# Altium PCB Samroz_PCB.PcbDoc
Units mil, origin at the board's own origin, x right, y up, seen from the top; angles counter-clockwise.
Board outline 3590 x 3360 mil, 2 copper layers (Top Layer, Bottom Layer); 38 components, 28 nets, 99 pads, 11 vias.
Unrouted connection lines stored in the file: 1.
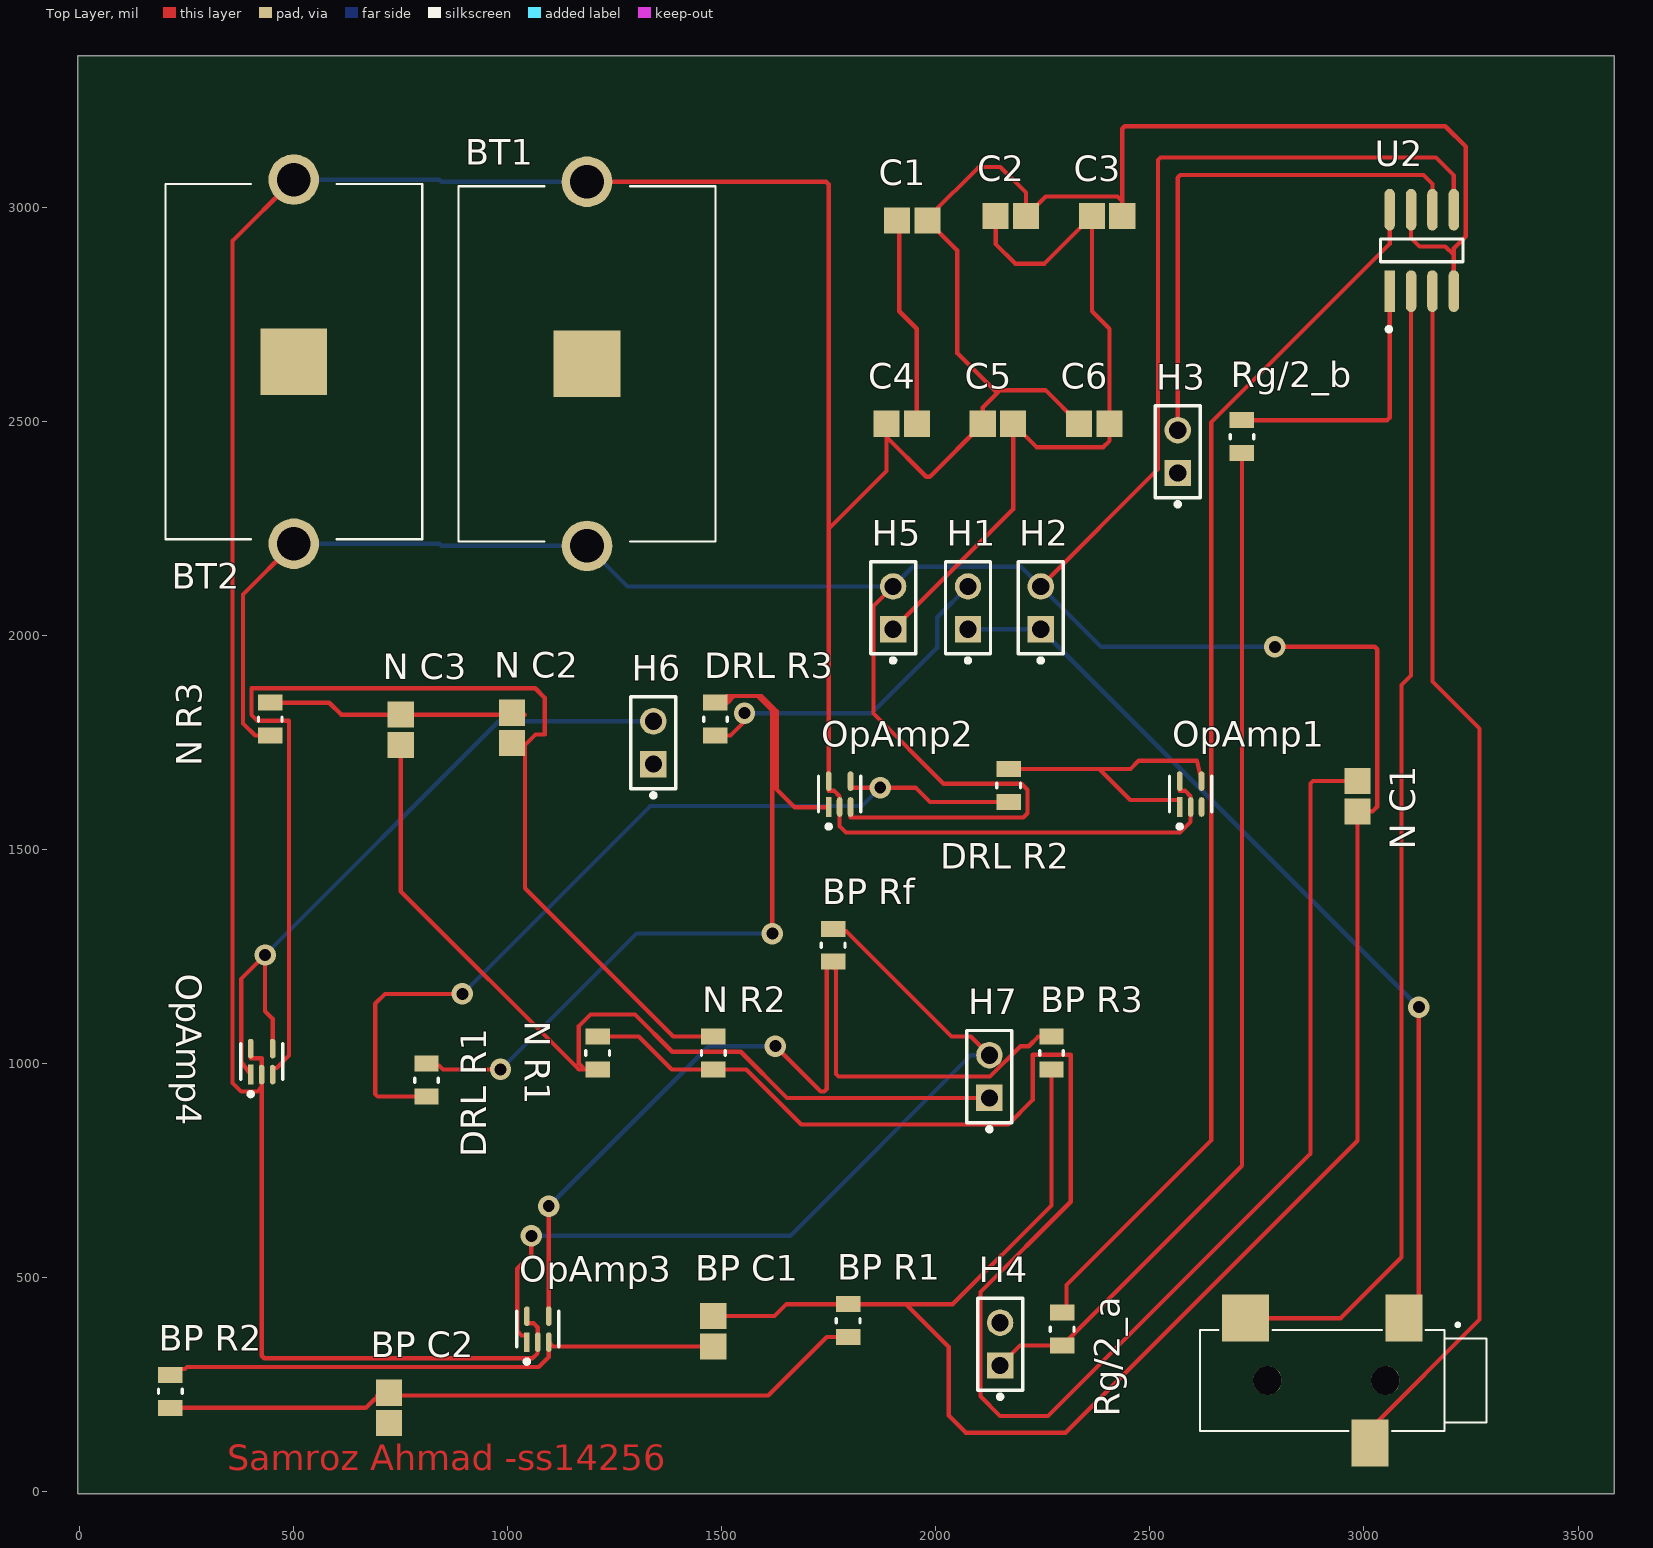
[diagram p0: Top Layer view]
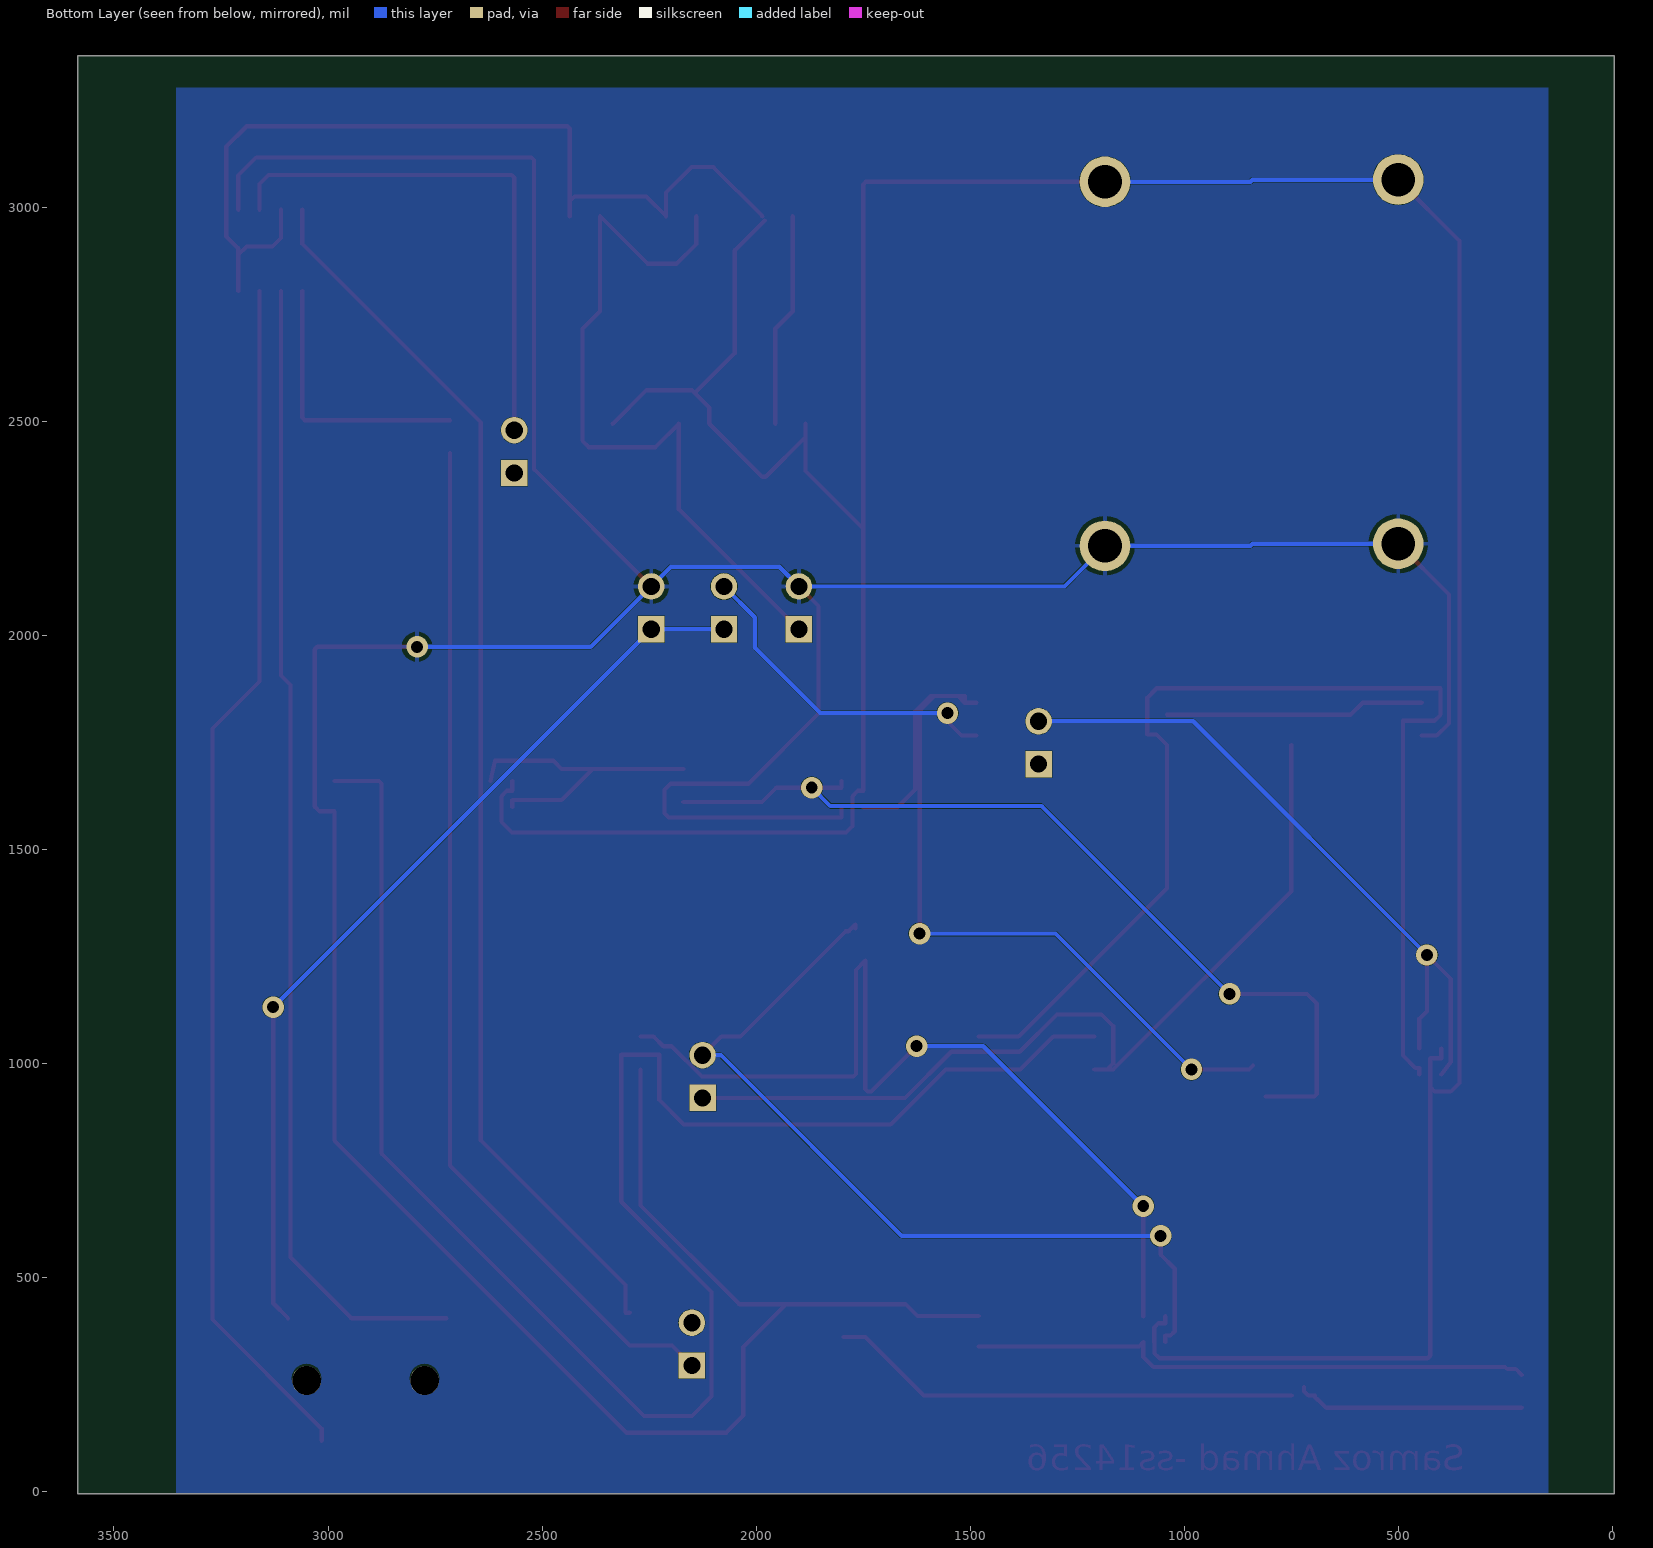
[diagram p1: Bottom Layer view, seen from below]
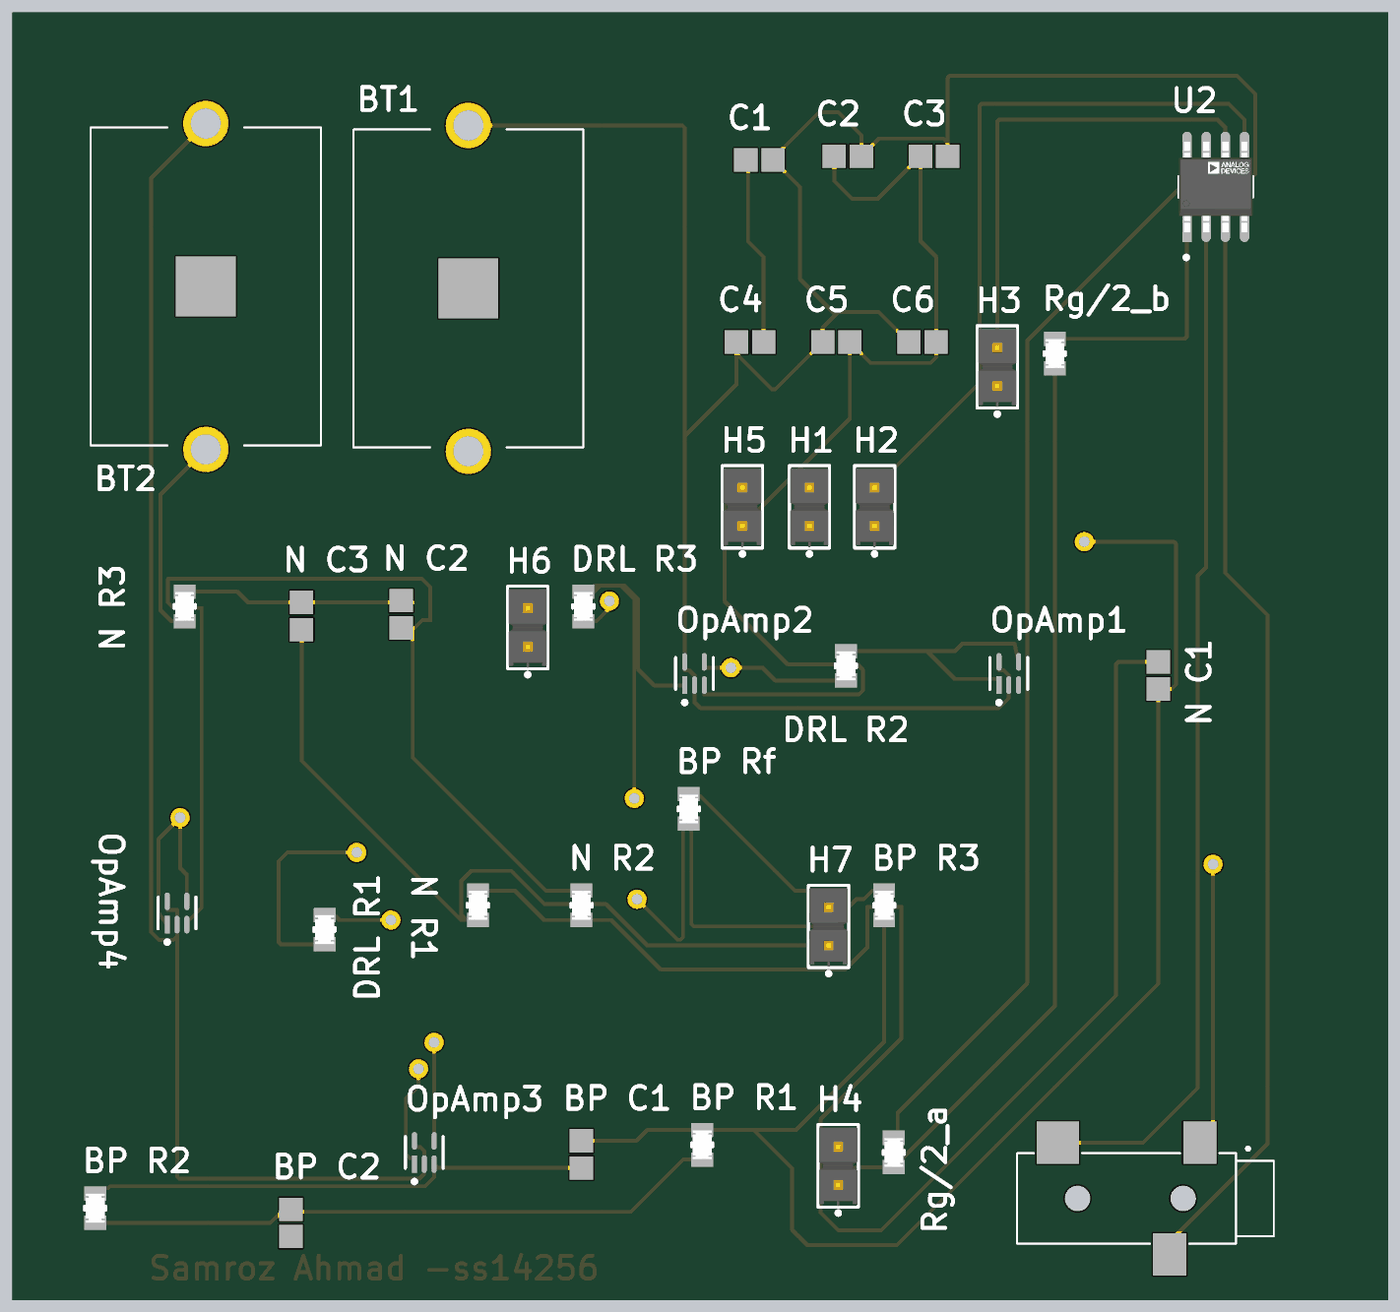
[diagram p2: 3D render of the assembled board from above, using the file's embedded part models]

## Layer stack, top to bottom
Top Solder: solder mask 0.4, Solder Resist, Dk 3.5
Top Layer: signal copper 1.4
Dielectric 1: dielectric 12.6, FR-4, Dk 4.8
Bottom Layer: signal copper 1.4
Bottom Solder: solder mask 0.4, Solder Resist, Dk 3.5

## Board outline
-5,-5 3585,-5 3585,3355 -5,3355

## Design rules (kind name [scope] priority, off if disabled: settings)
Clearance [All] p1: gap=0.5 ignorepadtopadclearanceinfootprint=FALSE
MinimumSolderMaskSliver [All] p1: minsoldermaskwidth=0.5
PolygonConnect [All] p1: connectstyle=Relief reliefconductorwidth=10 reliefentries=4 polygonreliefangle="90 Angle" airgapwidth=10
RoutingVias [All] p1: holewidth=28 width=50 viastyle="Through Hole" minholewidth=28 minwidth=50 maxholewidth=28 maxwidth=50
SilkToSolderMaskClearance [IsPad] p1: minsilkscreentomaskgap=5 clearancetoexposedcopper=TRUE
SolderMaskExpansion [All] p1: expansion=4 istentingtop=FALSE
Width [All] p1: maxlimit=10 minlimit=10 preferedwidth=10
28 further rules are at their usual default settings.

## Components (designator, comment, footprint, x,y, rotation, side; value= is the part's Value field where it differs from the comment)
"BP C1" "08052U220GAT2A" CAPC2013X115X51ML20T26 1480,375 r90 top
"BP C2" "08052U220GAT2A" CAPC2013X115X51ML20T26 722.07,195.95 r90 top
"BP R1" "CRCW08053K30FKEA" FP-CRCW0805-e3-MFG#1 1795,400 r90 top
"BP R2" "CRCW08053K30FKEA" FP-CRCW0805-e3-MFG#2 211.5,234.69 r90 top
"BP R3" "CRCW08053K30FKEA" FP-CRCW0805-e3-MFG#1 2270,1025 r90 top
"BP Rf" "CRCW08053K30FKEA" FP-CRCW0805-e3-MFG#1 1760,1276.61 r90 top
BT1 "BK-913-TR" BAT_BK-913-TR 1185,2635 r270 top
BT2 "BK-913-TR" BAT_BK-913-TR 500,2640 r90 top
C1 "08052U220GAT2A" CAPC2013X115X51ML20T26 1944.57,2970 r0 top
C2 "08052U220GAT2A" CAPC2013X115X51ML20T26 2175,2980 r0 top
C3 "08052U220GAT2A" CAPC2013X115X51ML20T26 2400,2980 r0 top
C4 "08052U220GAT2A" CAPC2013X115X51ML20T26 1920,2495 r0 top
C5 "08052U220GAT2A" CAPC2013X115X51ML20T26 2145,2495 r0 top
C6 "08052U220GAT2A" CAPC2013X115X51ML20T26 2370,2495 r0 top
"DRL R1" "CRCW08053K30FKEA" FP-CRCW0805-e3-MFG#1 810,961.61 r270 top
"DRL R2" "CRCW08053K30FKEA" FP-CRCW0805-e3-MFG#1 2170,1650 r90 top
"DRL R3" "CRCW08053K30FKEA" FP-CRCW0805-e3-MFG#1 1485,1805 r90 top
H1 "TSW-102-07-L-S" FP-TSW-102-07-L-S-MFG 2075,2065 r90 top
H2 "TSW-102-07-L-S" FP-TSW-102-07-L-S-MFG 2245,2065 r90 top
H3 "TSW-102-07-L-S" FP-TSW-102-07-L-S-MFG 2565,2430 r90 top
H4 "TSW-102-07-L-S" FP-TSW-102-07-L-S-MFG 2150,345 r90 top
H5 "TSW-102-07-L-S" FP-TSW-102-07-L-S-MFG 1900,2065 r90 top
H6 "TSW-102-07-L-S" FP-TSW-102-07-L-S-MFG 1340,1750 r90 top
H7 "TSW-102-07-L-S" FP-TSW-102-07-L-S-MFG 2125,970 r90 top
Jack1 "SJ-3523-SMT-TR" CUI_SJ-3523-SMT-TR 3050,260 r180 top
"N C1" "08052U220GAT2A" CAPC2013X115X51ML20T26 2985,1625 r90 top (schematic designator "Notch C1")
"N C2" "08052U220GAT2A" CAPC2013X115X51ML20T26 1010,1784.57 r90 top
"N C3" "08052U220GAT2A" CAPC2013X115X51ML20T26 750,1780 r90 top
"N R1" "CRCW08053K30FKEA" FP-CRCW0805-e3-MFG#1 1210,1025 r90 top
"N R2" "CRCW08053K30FKEA" FP-CRCW0805-e3-MFG#1 1480,1025 r90 top
"N R3" "CRCW08053K30FKEA" FP-CRCW0805-e3-MFG#1 445,1805 r90 top
OpAmp1 "TLV521DCKT" FP-DCK0005A-IPC_C 2595,1630 r90 top
OpAmp2 "TLV521DCKT" FP-DCK0005A-IPC_C 1775,1630 r90 top
OpAmp3 "TLV521DCKT" FP-DCK0005A-IPC_C 1070,380 r90 top
OpAmp4 "TLV521DCKT" FP-DCK0005A-IPC_C 425,1005 r90 top
Rg/2_a "CRCW08053K30FKEA" FP-CRCW0805-e3-MFG#1 2295,380 r90 top (schematic designator Rg/2_s)
Rg/2_b "CRCW08053K30FKEA" FP-CRCW0805-e3-MFG#1 2715,2465 r90 top (schematic designator Rg/2_f)
U2 "AD620ARZ-REEL7" FP-R-8-IPC_A 3135,2900 r90 top

## Footprints (in the part's own frame and the unit in brackets; to place one, negate y for a bottom-side part, rotate by r counter-clockwise, add the part's x,y. Pads: shape width x height; smd on the part's side, far side on the other; paste and mask are expansions set on the pad)
BAT_BK-913-TR [mm]
  round 3 hole 2: 1(-10.8,0) 2(10.8,0)
  rect 3.96x3.96 smd: 3(0,0)
  silkscreen extent -10.54,-7.62 10.54,7.62
CAPC2013X115X51ML20T26 [mm] "Chip Capacitor, 2-Leads, Body 2.01x1.25mm, IPC Low Density"
  rect 1.55x1.55 smd: 1(-0.9,0) 2(0.9,0)
  body extent -1.11,-0.72 1.1,0.72, height 1.15
CUI_SJ-3523-SMT-TR [mm]
  rect 2.2x2.8 smd: 1(-1.1,-3.7) 3(0.9,3.7)
  rect 2.8x2.8 smd: 2(8.3,-3.7)
  round 1.7 hole 1.7 unplated: ""(0,0) ""(7,0)
  silkscreen extent -6,-3.4 11,3
FP-CRCW0805-e3-MFG#1 [mm]
  rect 0.95x1.45 smd paste+0 mask+0: 1(-0.975,0) 2(0.975,0)
  silkscreen extent -0.13,-0.7 0.13,0.7, body extent -1.55,-0.82 1.55,0.82, height 0.25
FP-CRCW0805-e3-MFG#2 [mm]
  rect 0.95x1.45 smd paste+0 mask+0: 2(0.975,0) ""(-0.975,0)
  silkscreen extent -0.13,-0.7 0.13,0.7, body extent -1,-0.62 1,0.63, height 0.5
FP-DCK0005A-IPC_C [mm]
  rect 1.164x0.336 smd paste+0 mask+0: 1(-0.77,0.65)
  rrect100% 1.164x0.336 smd paste+0 mask+0: 2(-0.77,0) 3(-0.77,-0.65) 4(0.77,-0.65) 5(0.77,0.65)
  silkscreen extent -2.05,-1.25 1.05,1.25
FP-R-8-IPC_A [mil]
  rect 97.4x24.49 smd paste+0 mask+0: 1(-95.12,75)
  rrect100% 97.4x24.49 smd paste+0 mask+0: 2(-95.12,25) 3(-95.12,-25) 4(-95.12,-75) 5(95.12,-75) 6(95.12,-25) 7(95.12,25) 8(95.12,75)
  silkscreen extent -189,-96 27,96, body extent -164,-116 164,116, height 10
FP-TSW-102-07-L-S-MFG [mm]
  rect 1.57x1.57 hole 1.02 paste-1000 mask+0: 1(-1.27,0)
  round 1.57 hole 1.02 paste-1000 mask+0: 2(1.27,0)
  silkscreen extent -3.25,-1.34 2.73,1.34, body extent -2.83,-1.44 2.83,1.44, height 0.25

## Part data
"BP C1" "BP C2" C1 C2 C3 C4 C5 C6 "N C1" "N C2" "N C3": library part CMP-2007-04866-1, Manufacturer="AVX Interconnect / Elco", Part Number=08052U220GAT2A
"BP R1" "BP R2" "BP R3" "BP Rf" "DRL R1" "DRL R2" "DRL R3" "N R1" "N R2" "N R3" Rg/2_a Rg/2_b: library part CMP-2001-03876-2, "RES Thick Film, 3.3kΩ, 1%, 0.125W, 100ppm/°C, 0805", Case Code (Imperial)=0805, Case Code (Metric)=2012, Max Operating Temperature=155°C, Max Power Dissipation=125mW, Min Operating Temperature=-55°C, Package Quantity=10, Resistance=3.3kR, Temperature Coefficient=100ppm/°C, Tolerance=1%, Voltage Rating=150V, Case/Package=0805, Composition="Thick Film", Contact Plating=Tin, Depth=1.25mm, Features="Automotive AEC-Q200", Height=0.45mm, Lead Free="Lead Free", Length=2mm, Military Standard=Not, Mount="Surface Mount", Number of Terminations=2, Packaging="Tape and Reel", Power Rating=125mW, Radiation Hardening=No, Termination=SMD/SMT, Voltage Rating (DC)=150V, Weight=0.000194oz, Width=1.25mm
BT1 BT2: "Battery Retainer Coin, 20.0mm 1 Cell PC Pin", Package="MSOP-12 MPD", Digi-Key_Part_Number=BK-913-CT-ND, MF="MPD (Memory", MP=BK-913-TR, SnapEDA_Link=https://www.snapeda.com/parts/BK-913-TR/MPD%20(Memory%20Protection%20Devices)/view-part/576523/?ref=snap
H1 H2 H3 H4 H5 H6 H7: library part CMP-02766-001428-1, "CONN HEADER VERT 2POS 2.54MM", Color=Black, Current Rating=7.6A, Max Operating Temperature=125°C, Max Voltage Rating (AC)=550V, Min Operating Temperature=-55°C, Package Quantity=1, Connector Type="Male Pin", Contact Material=Bronze, Contact Mating Length=0.23inch, Contact Plating=Gold, Contact Type="Male Pin", Depth=2.54mm, Gender=Male, Housing Color=Black, Housing Material=Polyester, Lead Free="Lead Free", Length=5.08mm, Max Current Rating=7.6A, Mount="Through Hole", Number of Contacts=2, Number of Positions=2, Number of Rows=1, Orientation=Straight, Packaging=Bulk, Pitch=2.54mm, Radiation Hardening=No, REACH SVHC="No SVHC", RoHS Compliant=Yes, Series=TSW, Termination=Solder, Voltage Rating=550V, Width=2.54mm
Jack1: "<b>Audio Jack Connector</b> 3.5 mm Low Profile Surface Mount Stereo Jack, 3 Pin Right-Angle", Package=None, Availability=Unavailable, MP=SJ-3523-SMT-TR, Price=None
OpAmp1 OpAmp2 OpAmp3 OpAmp4: library part CMP-04895-000072-1, "IC CMOS 1 CIRCUIT SC70-5", Case/Package=SC, Input Bias Current=1pA, Input Offset Voltage (Vos)=100uV, Max Operating Temperature=125°C, Min Operating Temperature=-40°C, Operating Supply Current=350nA, Output Current per Channel=12mA, Bandwidth=6kHz, Gain Bandwidth Product=6kHz, Lead Free="Lead Free", Mount="Surface Mount", Number of Amplifiers=1, Number of Channels=1, Number of Circuits=1, Number of Pins=5, Packaging="Cut Tape", REACH SVHC="No SVHC", Slew Rate=2.5V/µs
U2: library part CMP-09116-000354-1, "IC INST AMP 1 CIRCUIT 8SOIC", Case/Package=SOIC, Dual Supply Voltage=15V, Input Bias Current=500pA, Input Offset Voltage (Vos)=30mV, Input Resistance=10GR, Max Dual Supply Voltage=18V, Max Operating Temperature=125°C, Max Power Dissipation=650mW, Min Dual Supply Voltage=2.3V, Min Operating Temperature=-55°C, Min Supply Voltage=4.6V, Nominal Supply Current=900uA, Operating Supply Current=1.3mA, Output Current per Channel=18mA, Package Quantity=1, Power Supply Rejection Ratio (PSRR)=140dB, -3db Bandwidth=1MHz, Bandwidth=800kHz, Common Mode Rejection Ratio=93dB, Contact Plating=Tin, Lead Free="Contains Lead", Mount="Surface Mount", Number of Channels=1, Number of Circuits=1, Number of Elements=1, Number of Pins=8, Operating Supply Voltage=18V, Packaging="Tape and Reel", Power Dissipation=650mW, Radiation Hardening=No, RoHS Compliant=Yes, Series=-, Slew Rate=1.2V/µs, Supply Current=900uA

## Via types
v1: diameter 50, hole 28, Top Layer to Bottom Layer, 11 vias

## Nets (pads, with @x,y where several pads share a name; then routed paths per layer and width w, separated by ;. In a path a pad name is that pad's centre, name@x,y a point inside that pad or via, vN(x,y) a via of type N, cw(c..) or ccw(c..) an arc to the next point about the centre after c; other vN are vias at no path point)
"Bandpass input": H3.1
GND: "BP C1.2" "BP R1.2" "BP R3.1" "N C1.1" "N R3.1" BT1.2 BT2.1 H2.2 H5.2 OpAmp2.3 U2.5 | length 10321.3
  Top Layer w10: 445,1766.61 409.84,1766.61 381.46,1795 381.46,2096.26 BT2.1 ; 1480,410.43 1623,410.43 1650.95,438.39 1795,438.39 1929.61,438.39 ; OpAmp2.3 1800.59,1575 2204,1575 2214,1585 2214,1640 2200,1654 2018,1654 1854,1818 1854,2069 H5.2 ; H2.2 2519,2389 2519,3111.14 2524.86,3117 3168,3117 3210,3075 U2.5 ; 2270,986.61 2270,669 2039.39,438.39 1929.61,438.39 ; v1(2792,1974) 3025.14,1974 3031,1968.14 3031,1600.57 3020,1589.57 2985,1589.57 2985,820 2303,138 2070,138 2030,178 2030,338 1929.61,438.39
  Bottom Layer w10: BT2.1 840,2214.8 845,2209.8 BT1.2 1279.8,2115 H5.2 1946,2161 2199,2161 H2.2 2386,1974 v1(2792,1974)
"Input of Bandpass": "BP C2.1"
"Input of DRL": "DRL R3.1" H1.2 | length 787.3
  Top Layer w10: 1485,1766.61 1520,1766.61 1553,1799.61 v1(1553,1819)
  Bottom Layer w10: v1(1553,1819) 1850,1819 2003,1972 2003,2043 H1.2
"Input of Notch": "N C3.1" "N R1.1" H7.1 | length 2132.4
  Top Layer w10: 750,1744.57 750,1402.61 1166,986.61 1180,986.61 ; 1210,986.61 1180,986.61 ; H7.1 1652,920 1544,1028 1384,1028 1297,1115 1193,1115 1166,1088 1166,1000.61 1180,986.61
"NetBP C1_1": "BP C1.1" "BP R2.2" OpAmp3.3 | length 1324.7
  Top Layer w10: 211.5,273.07 225.2,286.77 245.39,286.77 250.38,291.77 1072.36,291.77 1095.59,315 OpAmp3.3 1105.71,339.57 1480,339.57
"NetBP C2_2": "BP C2.2" "BP R1.1" "BP R2." | length 1639.2
  Top Layer w10: 211.5,196.3 668.37,196.3 687.21,215.14 688.63,215.14 694.49,221 694.49,224.49 695,225 710,225 720,235 720,245 ; 748.92,225 1608.39,225 1745,361.61 1795,361.61
"NetBP R3_2": "BP R3.2" "BP Rf.1" OpAmp3.4 | length 2225.8
  Top Layer w10: OpAmp3.4 v1(1095.59,667.18) ; v1(1625,1041) 1730.86,935.14 1739.14,935.14 1745,941 1745,1240.96 1766.81,1219.14 1766.81,975.86 1772.67,970 2126.49,970 2197.49,1041 2216.97,1041 2239.35,1063.39 2270,1063.39
  Bottom Layer w10: v1(1095.59,667.18) 1469.41,1041 v1(1625,1041)
"NetBP Rf_2": "BP Rf.2" H7.2 OpAmp3.1 | length 2012.8
  Top Layer w10: OpAmp3.1 1044.41,365 1032,365 1022,375 1022,521 1055,554 v1(1055,598) ; 1768.52,1316.33 1768.52,1323.1 ; 1768.52,1324.71 1783.54,1309.69 1790.31,1309.69 2036.61,1063.39 2081.61,1063.39 H7.2
  Bottom Layer w10: v1(1055,598) 1660,598 2082,1020 H7.2
NetC1_1: C1.1 C4.2 | length 501.9
  Top Layer w10: C1.1@1914.57,2980 1914.57,2757.87 1955.43,2717 C4.2
NetC2_1: C2.1 C3.1 C5.2 C6.2 H5.1 | length 1746.8
  Top Layer w10: H5.1 2180.43,2295.43 C5.2 2235,2440.43 2390.87,2440.43 2405.43,2455 C6.2 2405.43,2717 2364.57,2757.87 C3.1 2253.57,2869 2185.57,2869 2139.57,2915 C2.1
"NetDRL R1_1": "DRL R1.1" "DRL R3.2" OpAmp2.1 | length 2056.7
  Top Layer w10: 839.11,995.89 848.39,986.61 v1(983,986.61) ; 1485,1843.39 1512,1843.39 ; v1(1618,1304) 1618,1824 1583,1859 1528.35,1859 ; OpAmp2.1 1749.41,1599 1670,1599 1628,1641 1628,1823.78 1592.74,1859.04 1528.39,1859.04 1528.35,1859 ; 1512,1843.39 1512,1859 1528.35,1859 ; 1512,1843.39 1512.74,1843.39 1528.35,1859
  Bottom Layer w10: v1(983,986.61) 1300.39,1304 v1(1618,1304)
"NetDRL R1_2": "DRL R1.2" "DRL R2.1" OpAmp2.4 | length 2121.1
  Top Layer w10: 810,923.23 695.86,923.23 690,929.09 690,1140 713,1163 v1(894,1163) ; OpAmp2.4 1800.59,1645 v1(1870,1645) 1952.61,1645 1986,1611.61 2170,1611.61
  Bottom Layer w10: v1(894,1163) 1333,1602 1827,1602 v1(1870,1645)
"NetDRL R2_2": "DRL R2.2" OpAmp1.1 OpAmp1.4 | length 731.1
  Top Layer w10: 2170,1688.39 2381.61,1688.39 ; OpAmp1.1 2569.41,1616 2454,1616 2381.61,1688.39 ; OpAmp1.4 2610,1708 2474,1708 2454.39,1688.39 2381.61,1688.39
NetH3_2: H3.2 U2.6 | length 1256.1
  Top Layer w10: H3.2 2565,3070 2571,3076 3139,3076 3160,3055 U2.6
NetH4_1: H4.1 Rg/2_a.1 Rg/2_b.1 | length 2423.3
  Top Layer w10: H4.1 2196.61,341.61 Rg/2_a.1 2715,761.61 Rg/2_b.1
NetH6_2: H6.2 OpAmp4.1 OpAmp4.4 | length 1669.2
  Top Layer w10: OpAmp4.1 377,1004 377,1198 v1(433,1254) 433,1122.59 450.59,1105 OpAmp4.4
  Bottom Layer w10: v1(433,1254) 979,1800 H6.2
NetJack1_2: Jack1.2 U2.2 | length 2689.7
  Top Layer w10: Jack1.2 2945.67,405.67 3087.8,547.8 3087.8,1884.74 3110,1906.94 U2.2
NetJack1_3: Jack1.3 U2.3 | length 2836.9
  Top Layer w10: Jack1.3@3014.57,119.33 3014.57,147 3270,402.43 3270,1782.74 3160,1892.74 U2.3
"NetN C2_1": "N C2.1" "N R2.2" OpAmp4.3 | length 2757.1
  Top Layer w10: OpAmp4.3 450.59,990 460,990 489,1019 489,1801 415.46,1801 401.46,1815 401.46,1877.09 1063.91,1877.09 1086,1855 1086,1769 1064.43,1769 1040,1744.57 1040,1410 1386.61,1063.39 1480,1063.39
"NetN C2_2": "N C2.2" "N C3.2" "N R3.2" | length 606.6
  Top Layer w10: 445,1843.39 583,1843.39 610.95,1815.43 750,1815.43 1040,1815.43
"NetN R1_2": "N C1.2" "N R1.2" "N R2.1" | length 4226.1
  Top Layer w10: 1210,1063.39 1306,1063.39 1382.77,986.61 1480,986.61 1557,986.61 1685.61,858 2169,858 2226,915 2226,1021 2315,1021 2315,677.6 2104,466.6 2104,223 2150,177 2262,177 2874.94,789.94 2874.94,1654.58 2880.79,1660.43 2985,1660.43
NetRg/2_f_2: Rg/2_b.2 U2.1 | length 643.1
  Top Layer w10: Rg/2_b.2 3054.14,2503.39 3060,2509.24 U2.1
NetRg/2_s_2: Rg/2_a.2 U2.8 | length 2899.5
  Top Layer w10: Rg/2_a.2 2305,418.39 2305,483 2643,821 2643,2498 3060,2915 U2.8
"Ouput of DRL": H4.2
"Output of DRL": OpAmp1.3
"Right Leg": H1.1 H2.1 Jack1.1 | length 2159.5
  Top Layer w10: Jack1.1 3128,440.36 v1(3128,1132)
  Bottom Layer w10: H1.1 H2.1 v1(3128,1132)
Vcc+: BT1.1 BT2.2 C1.2 C2.2 C3.2 C4.1 C5.1 C6.1 OpAmp1.2 OpAmp1.5 OpAmp2.2 OpAmp2.5 OpAmp3.2 OpAmp3.5 OpAmp4.2 OpAmp4.5 U2.4 U2.7 | length 11033.9
  Top Layer w10: OpAmp4.5 399.41,1013 425,1013 OpAmp4.2 425,945 ; BT2.2 357,2922.2 357,955 377,935 415,935 425,945 ; OpAmp3.5 1044.41,394 1060,394 1070,384 OpAmp3.2 1069.41,349.09 1069.41,323.41 1057.77,311.77 430.86,311.77 425,317.63 425,945 ; BT1.1 1743.55,3060.2 1749.41,3054.34 1749.41,2249.41 ; C4.1 1884.57,2464.43 ; C1.2 2050,2900 2050,2660 2143.22,2566.78 ; C1.2@1985.43,2980 2100.43,3095 2150.43,3095 2210.43,3035 C2.2 2256.43,3026 2424.43,3026 2435.43,3015 ; C6.1 2256,2573.57 2150,2573.57 2143.22,2566.78 ; C3.2 2435.43,3015 ; OpAmp1.5 2569.41,1638 2582,1638 2595,1625 OpAmp1.2 2595,1565 2570,1540 1790,1540 1775,1555 OpAmp2.2 1775,1625 1762,1638 1749.41,1638 OpAmp2.5 1749.41,2249.41 ; U2.7 3110,2929 3130,2909 3190,2909 3210,2889 ; U2.4 3210,2889 ; 1749.41,2249.41 1884.57,2384.57 1884.57,2464.43 ; 1884.57,2464.43 1977.64,2371.36 1985.93,2371.36 C5.1 2109.57,2533.13 2143.22,2566.78 ; 2435.43,3015 2435.43,3184.14 2441.29,3190 3190,3190 3238,3142 3238,2933 3210,2905 3210,2889
  Bottom Layer w10: BT2.2 840,3065.2 845,3060.2 BT1.1
pads on no net: BT1.3 BT2.3 H6.1 Jack1.

## Polygon pours and split planes (outlines as drawn)
GND on Bottom Layer "GND_L02_P002" (solid, pour order 2): 150,-5 3355,-5 3355,3280 150,3280

## Other copper
Top Layer:
  text "Samroz Ahmad -ss14256" at 345,50 h60